# EAGLE board usb_uart (EAGLE 6.4)
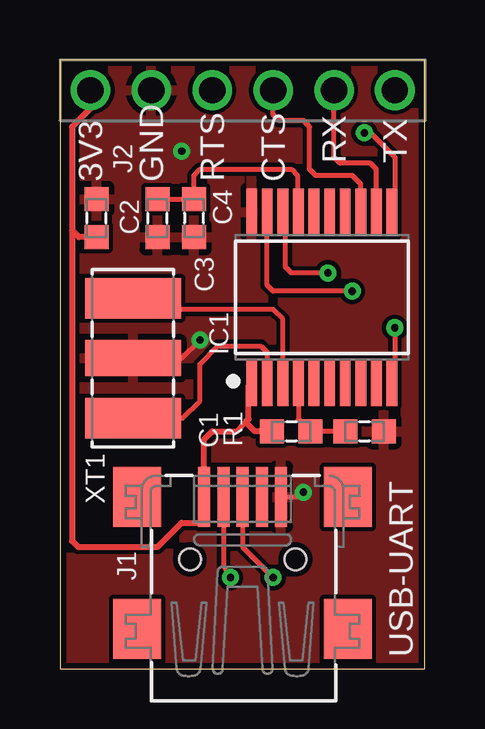
[diagram p0: board, top side]
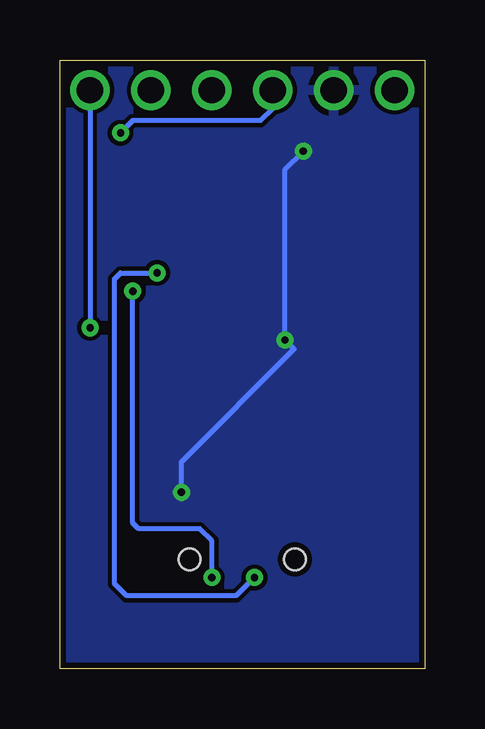
[diagram p1: board, bottom side, seen from below]

Size 15.23 x 25.39 mm. Coordinates in mm from the lower left corner, seen from the top.
Outline: 0,0 15.23,0 15.23,25.39 0,25.39 0,0
Copper layers (1*16): Top 0.035mm / dielectric 1.5mm / Bottom 0.035mm
Design rules "default *": minimum track width 8mil, minimum drill 12mil, track to track 7mil, track to pad 7mil, pad to pad 7mil, via to via 7mil, smd to smd 7mil, copper to edge 10mil, drill to drill 8mil, minimum pad ring 10mil, minimum via ring 8mil, stop-mask expansion 4mil, vias tented up to drill 0mil, thermal gap 10mil

## Footprints (pad centres in the part's own frame; a part is rotated, then mirrored left to right if it is on the bottom)
CAPC0603 = smd 1 x 1: 1 0.8,0; 2 -0.8,0
SOP65P775X200-20M = smd 1.95 x 0.45: 1 -3.55,2.925; 2 -3.55,2.275; 3 -3.55,1.625; 4 -3.55,0.975; 5 -3.55,0.325; 6 -3.55,-0.325; 7 -3.55,-0.975; 8 -3.55,-1.625; 9 -3.55,-2.275; 10 -3.55,-2.925; 11 3.55,-2.925; 12 3.55,-2.275; 13 3.55,-1.625; 14 3.55,-0.975; 15 3.55,-0.325; 16 3.55,0.325; 17 3.55,0.975; 18 3.55,1.625; 19 3.55,2.275; 20 3.55,2.925
USB-MINIB-SMD+SMD+RET = smd 2.5 x 0.5: 1 2.6,1.6; 2 2.6,0.8; 3 2.6,0; 4 2.6,-0.8; 5 2.6,-1.6 | smd 2.5 x 2: 6 2.6,4.4; 7 -2.9,4.4; 8 2.6,-4.4; 9 -2.9,-4.4 | hole 0.9: 0,2.2; 0,-2.2
PHSP254P1524X254X1154-6S = drill 1.1: 1 0,0; 2 2.54,0; 3 5.08,0; 4 7.62,0; 5 10.16,0; 6 12.7,0
RESC0603 = smd 1 x 1: P$1 0.8,0; P$2 -0.8,0
CERAMIC740X340-3N = smd 1.7 x 4: 1 -2.5,0; 3 2.5,0 | smd 1.5 x 4: 2 0,0

## Placement (x,y rotation side)
C1  0.1uF  [CAPC0603]  9.65,9.91 180 top
C2  0.1uF  [CAPC0603]  1.52,18.8 270 top
C3  0.1uF  [CAPC0603]  4.06,18.8 90 top
C4  0.1uF  [CAPC0603]  5.59,18.8 90 top
IC1  [SOP65P775X200-20M]  10.92,15.49 90 top
J1  [USB-MINIB-SMD+SMD+RET]  7.62,4.57 90 top
J2  [PHSP254P1524X254X1154-6S]  1.27,24.13 0 top
R1  10k  [RESC0603]  12.7,9.91 0 top
XT1  12MHz  [CERAMIC740X340-3N]  3.05,12.95 90 top

## Library data of the parts
C1-C4 = kemet-capacitors-ceramic; DATASHEET: http://www.kemet.com/kemet/web/homepage/kechome.nsf/weben/B79D94FAACCDEFCE852579F10063745E/$file/KEM_CC101_COMM_SMD.pdf; DESCRIPTION: Capacitores cerámicos de capas múltiples (MLCC) - SMD/SMT0603 25volts 0.1uF Y5V -20+80%; EAGLEUP: CAPC0603; M-PRICE: 0.1; MANUFACTURER: KEMET; MOUSER: 80-C0603C104Z3V; OCTOPART-LINK: http://octopart.com/c0603c104z3vactu-kemet-98662
IC1 = mchp-interface; EAGLEUP: SOP65P775X200-28N
J1 = te-usb; EAGLEUP: USB-MINIB-SMD+SMD+RET
J2 = wurth-pin-socket-headers; AVRG-PRICE: 0.41; DATASHEET: http://www.mouser.com/ds/2/445/6130xx11121-48870.pdf; DESCRIPTION: pin header straight post 2.54"; EAGLEUP: PHSP254P1524X254X1154-6S; MANUFACTURER: WURTH; MOUSER: 710-61300611121; OCTOPART-LINK: http://octopart.com/61300611121-w%C3%BCrth+elektronik+midcom-20084590
R1 = te-fixed-resistors; AVRG-PRICE: 0.1; DATASHEET: http://www.te.com/commerce/DocumentDelivery/DDEController?Action=showdoc&DocId=Data+Sheet%7F1773204%7FH%7Fpdf%7FEnglish%7FENG_DS_1773204_H.pdf%7F1623095-1; DESCRIPTION: Resistores de película gruesa - SMD CRG0603 1% 10K 10KRL; EAGLEUP: RESC0603; MOUSER: 279-CRG0603F10K/10; OCTOPART-LINK: http://octopart.com/crg0603f10k10-tyco+electronics-16077289
XT1 = abracon-resonators; EAGLEUP: CERAMIC740X340-3N; MANUFACTURER: ABRACON

## Nets
+3V3: C1.1 C2.1 IC1.1 J1.1 J2.1
CTS: IC1.13 J2.4
GND: C2.2 C3.2 C4.2 IC1.20 J1.5 J2.2 R1.P$1 XT1.2
N$1: IC1.2 XT1.1
N$2: IC1.3 XT1.3
N$3: C1.2 IC1.4 R1.P$2
N$4: IC1.19 J1.3
N$5: IC1.18 J1.2
N$9: C3.1 C4.1 IC1.17
RTS: IC1.11 J2.3
RX: IC1.12 J2.5
TX: IC1.10 J2.6

## Tracks (layer width: path | path; a pad name or v marks a point on that pad's centre or on a via)
+3V3
  Top 0.254: J2.1 1.27,23.37 0.51,22.61 0.51,18.29 | 0.51,18.29 0.51,5.33 0.76,5.08 4.06,5.08 5.08,6.1 6.1,6.1 6.1,7.1 J1.1 6.02,9.58 6.35,9.91 7.37,9.91 7.75,10.29 | 7.75,10.29 7.87,10.41 7.87,11.82 IC1.1 | C1.1 8.13,9.91 7.75,10.29 | C2.1 0.8,18 0.51,18.29
CTS
  Top 0.203: IC1.13 12.55,20.22 12.19,20.57 10.67,20.57 10.41,20.83 10.41,22.61 10.16,22.86 9.14,22.86 8.89,23.11 J2.4
GND  (via drill 0.3)
  Top 0.203: XT1.2 5.08,12.95 v5.84,13.72 | J1.5 9.97,7.17 v10.16,7.37
  Bottom 0.203: v5.08,21.59 5.84,20.83 v5.84,13.72 5.46,13.34 10.16,8.64 v10.16,7.37
  pour Top: 0,25.4 15.24,25.4 15.24,0 0,0
  pour Bottom: 0,25.4 15.24,25.4 15.24,0 0,0
N$1
  Top 0.203: XT1.1 5.12,10.45 5.84,11.18 5.84,12.7 6.6,13.46 8.38,13.46 8.64,13.21 8.64,11.96 IC1.2
N$2
  Top 0.203: IC1.3 9.3,14.58 8.89,14.99 3.52,14.99 XT1.3
N$3
  Top 0.203: R1.P$2 C1.2 9.95,10.41 IC1.4
N$4  (via drill 0.3)
  Top 0.203: J1.3 7.62,5.08 v8.89,3.81 | IC1.19 8.64,19.03 8.64,18.29 8.64,17.78 8.64,16 8.89,15.75 v12.19,15.75
  Bottom 0.203: v8.89,3.81 8.89,5.33 9.4,5.84 11.94,5.84 12.19,6.1 v12.19,15.75
N$5  (via drill 0.3)
  Top 0.203: J1.2 6.82,4.28 v7.11,3.81 | v11.18,16.51 9.65,16.51 9.4,16.76 9.4,18.94 IC1.18
  Bottom 0.203: v7.11,3.81 7.87,3.05 12.45,3.05 12.95,3.56 12.95,16.26 12.7,16.51 v11.18,16.51
N$9
  Top 0.203: C3.1 C4.1 5.59,20.57 5.84,20.83 9.65,20.83 9.91,20.57 9.91,19.09 IC1.17
RTS  (via drill 0.3)
  Top 0.203: v12.7,22.35 12.95,22.35 13.97,21.34 13.97,19.17 IC1.11
  Bottom 0.203: J2.3 6.35,23.37 6.86,22.86 12.19,22.86 v12.7,22.35
RX
  Top 0.203: IC1.12 13.2,20.84 12.95,21.08 11.68,21.08 11.43,21.34 J2.5
TX  (via drill 0.3)
  Top 0.203: v13.97,14.22 13.97,12.07 IC1.10
  Bottom 0.203: J2.6 v13.97,14.22

## Text on the board
tPlace: RX | TX | 3V3 | GND | RTS | CTS | USB-UART